# Altium PCB PCB1.PcbDoc (part 1 of 2)
Units mil, origin at the board's own origin, x right, y up, seen from the top; angles counter-clockwise.
Board outline 7474.71 x 6958.47 mil, 4 copper layers (PowerLayer1, PowerLayer2, GndLayer, SignalLayer), stack 30.635 mil thick; 145 components, 77 nets, 394 pads, 59 vias.
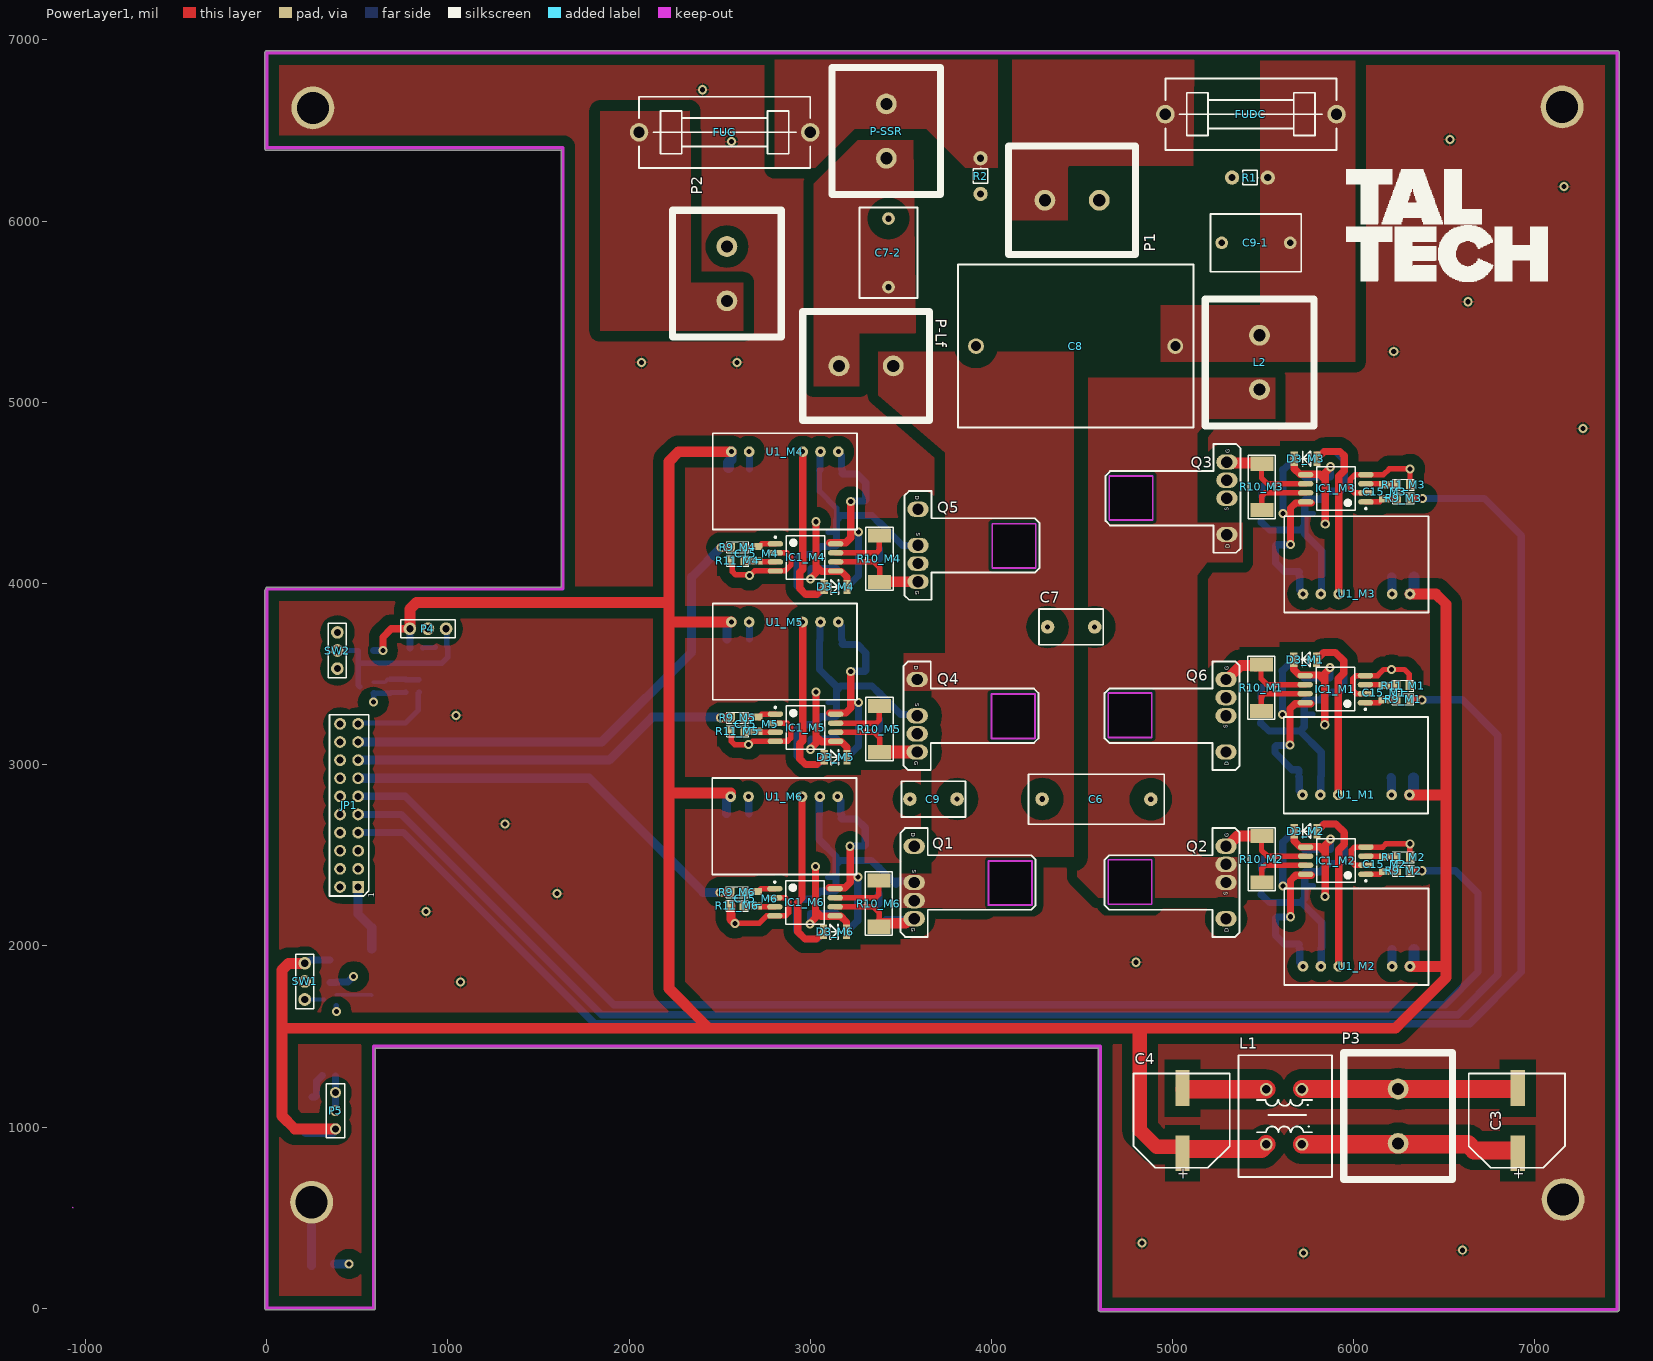
[diagram p0: PowerLayer1 view]
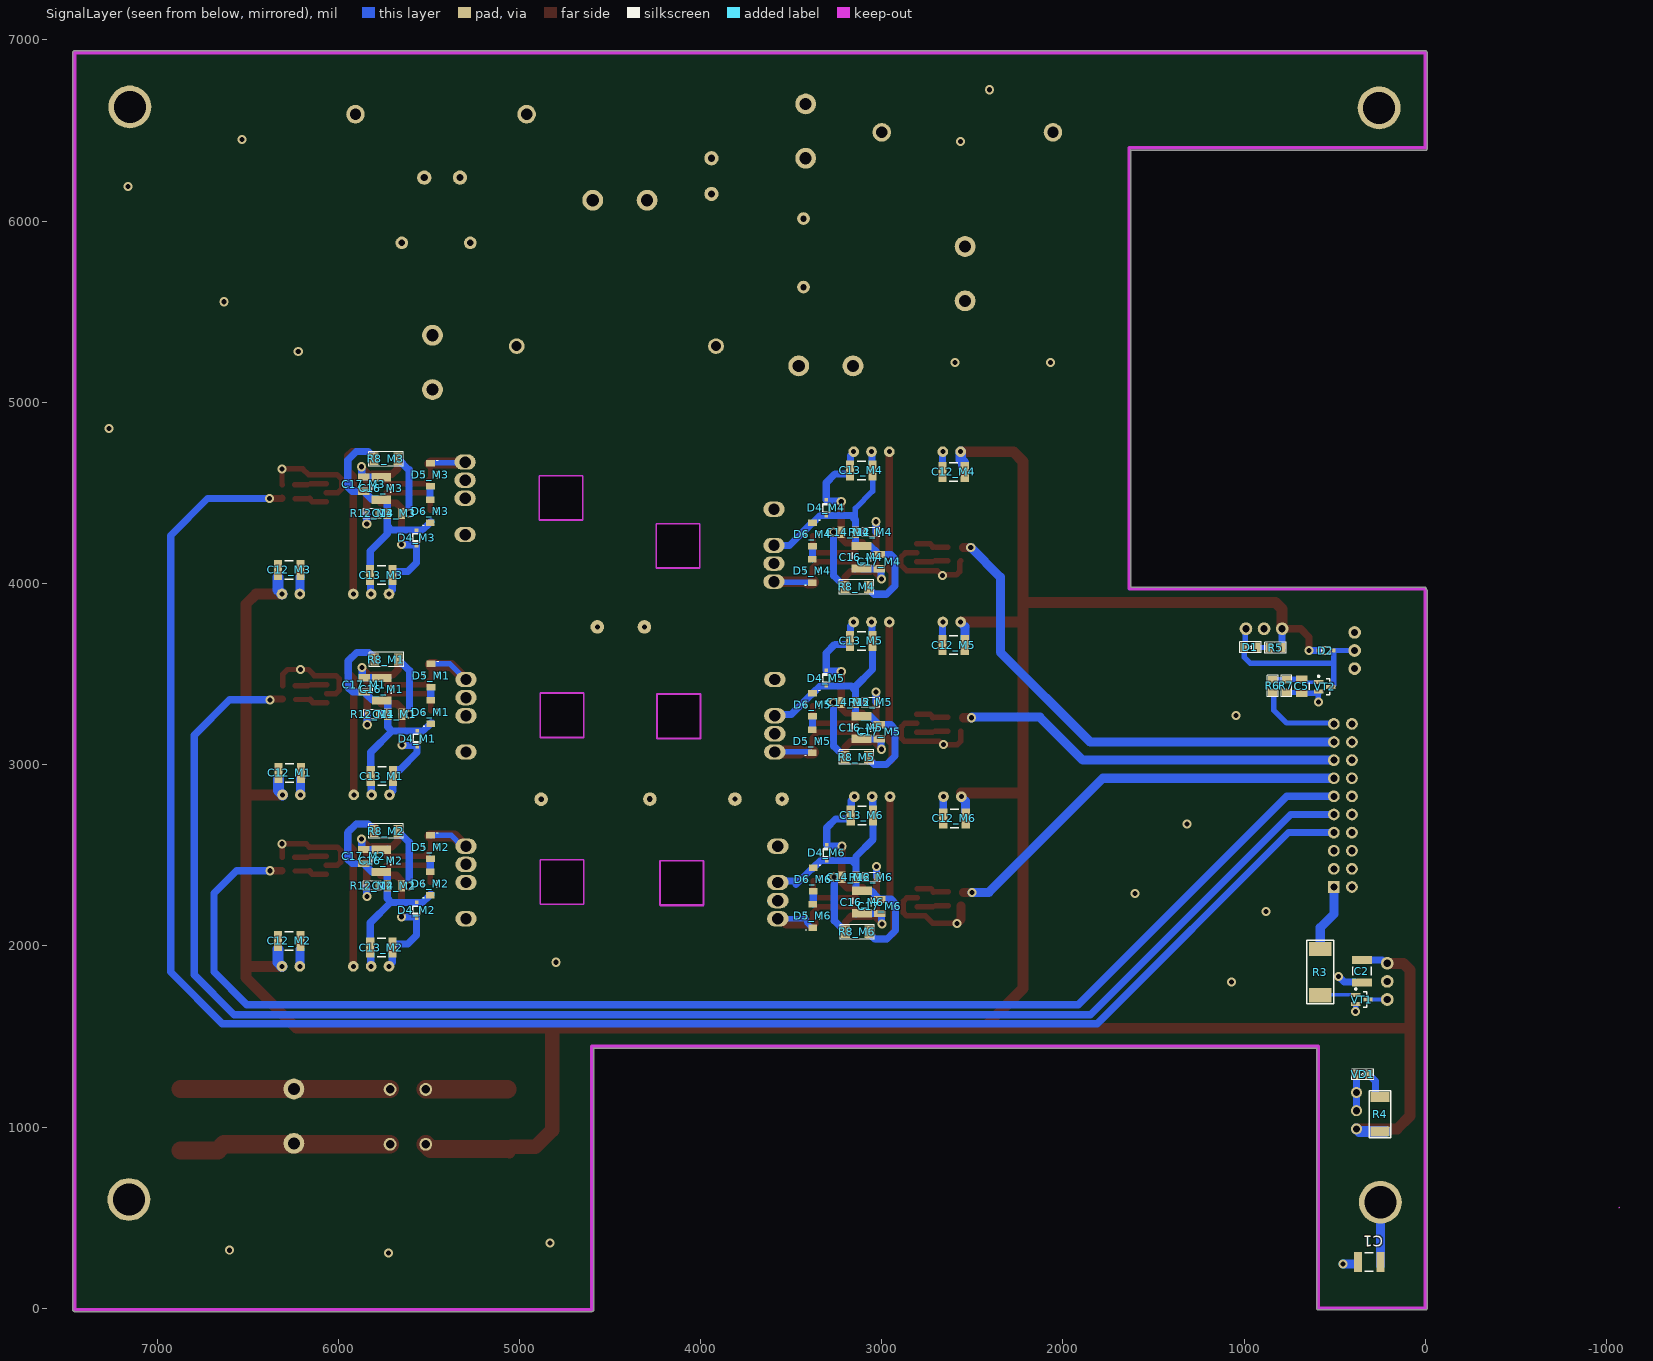
[diagram p1: SignalLayer view, seen from below]
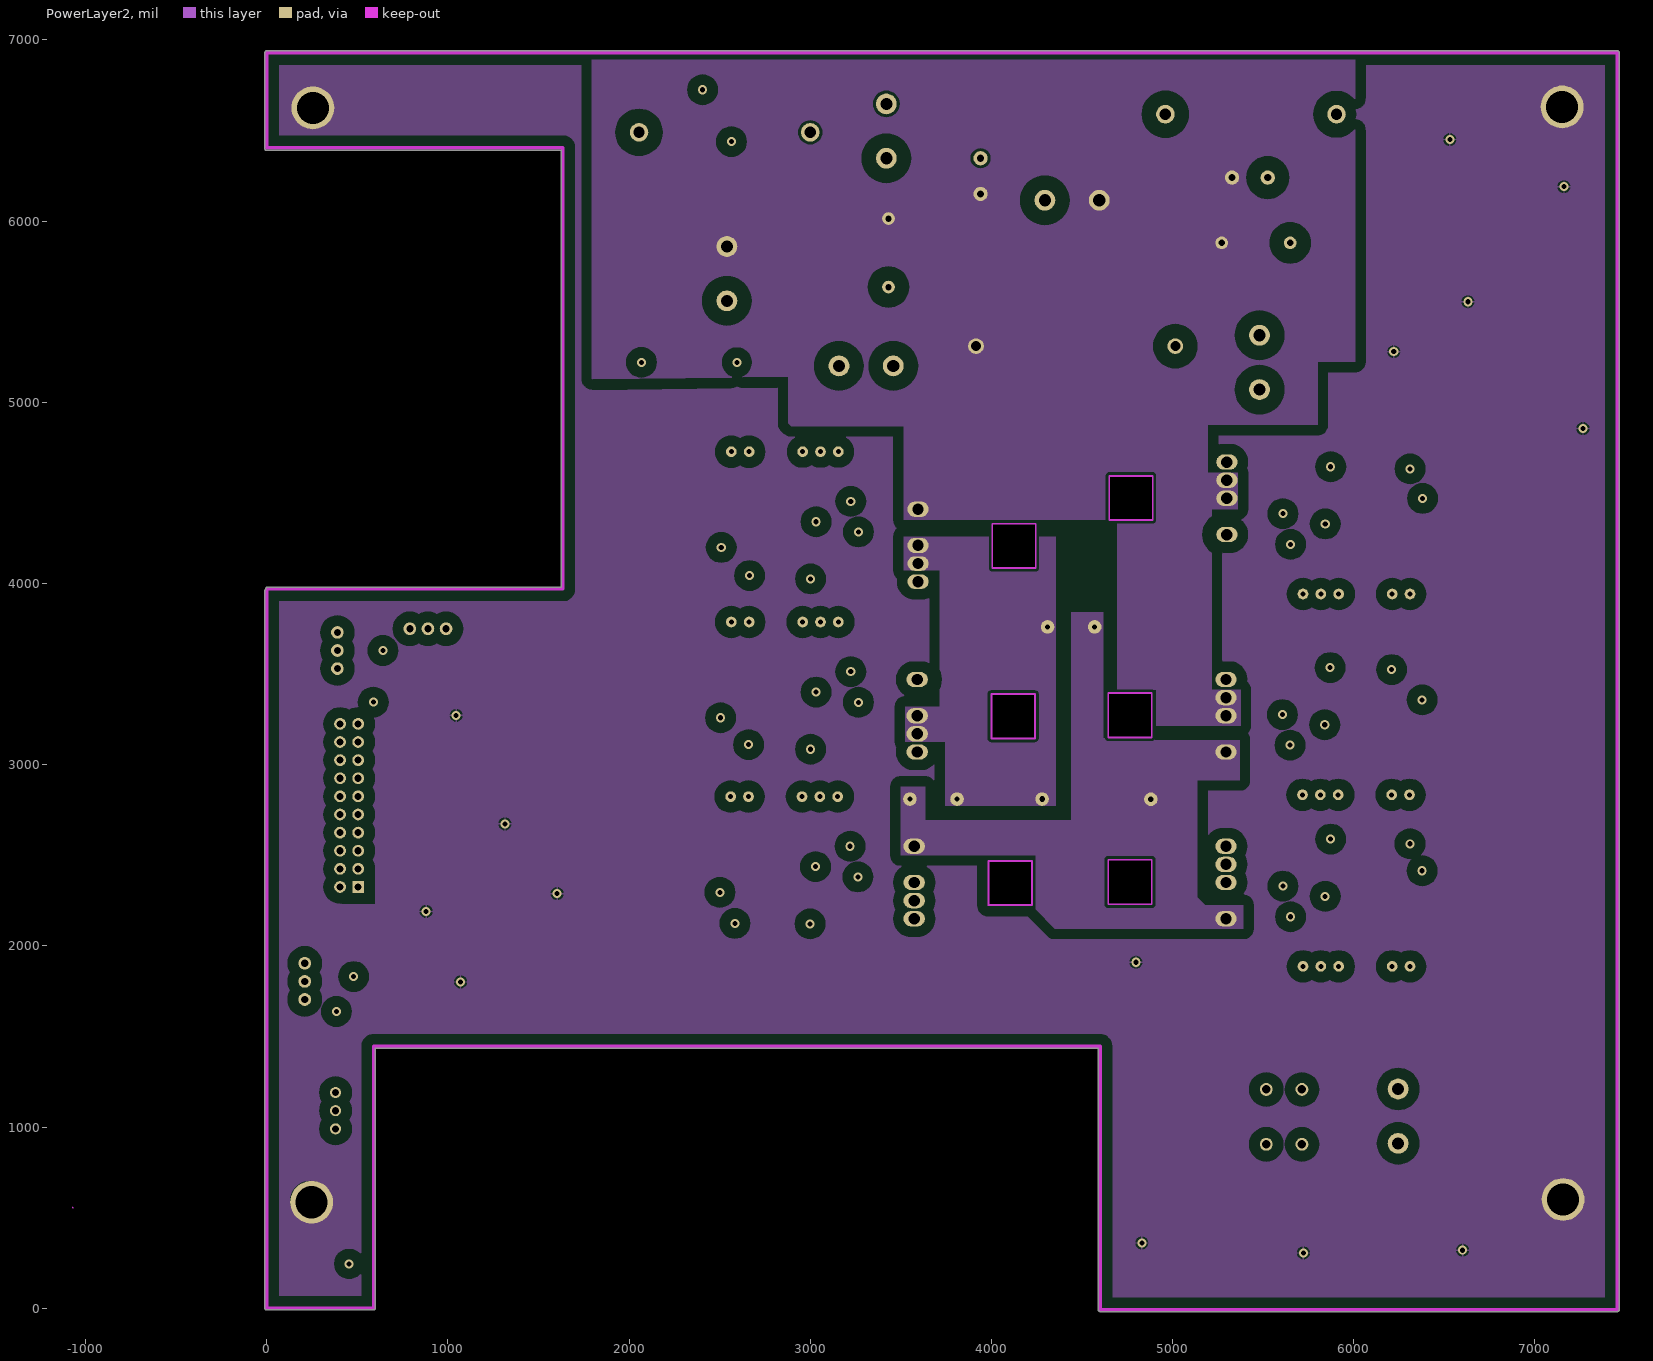
[diagram p2: PowerLayer2]
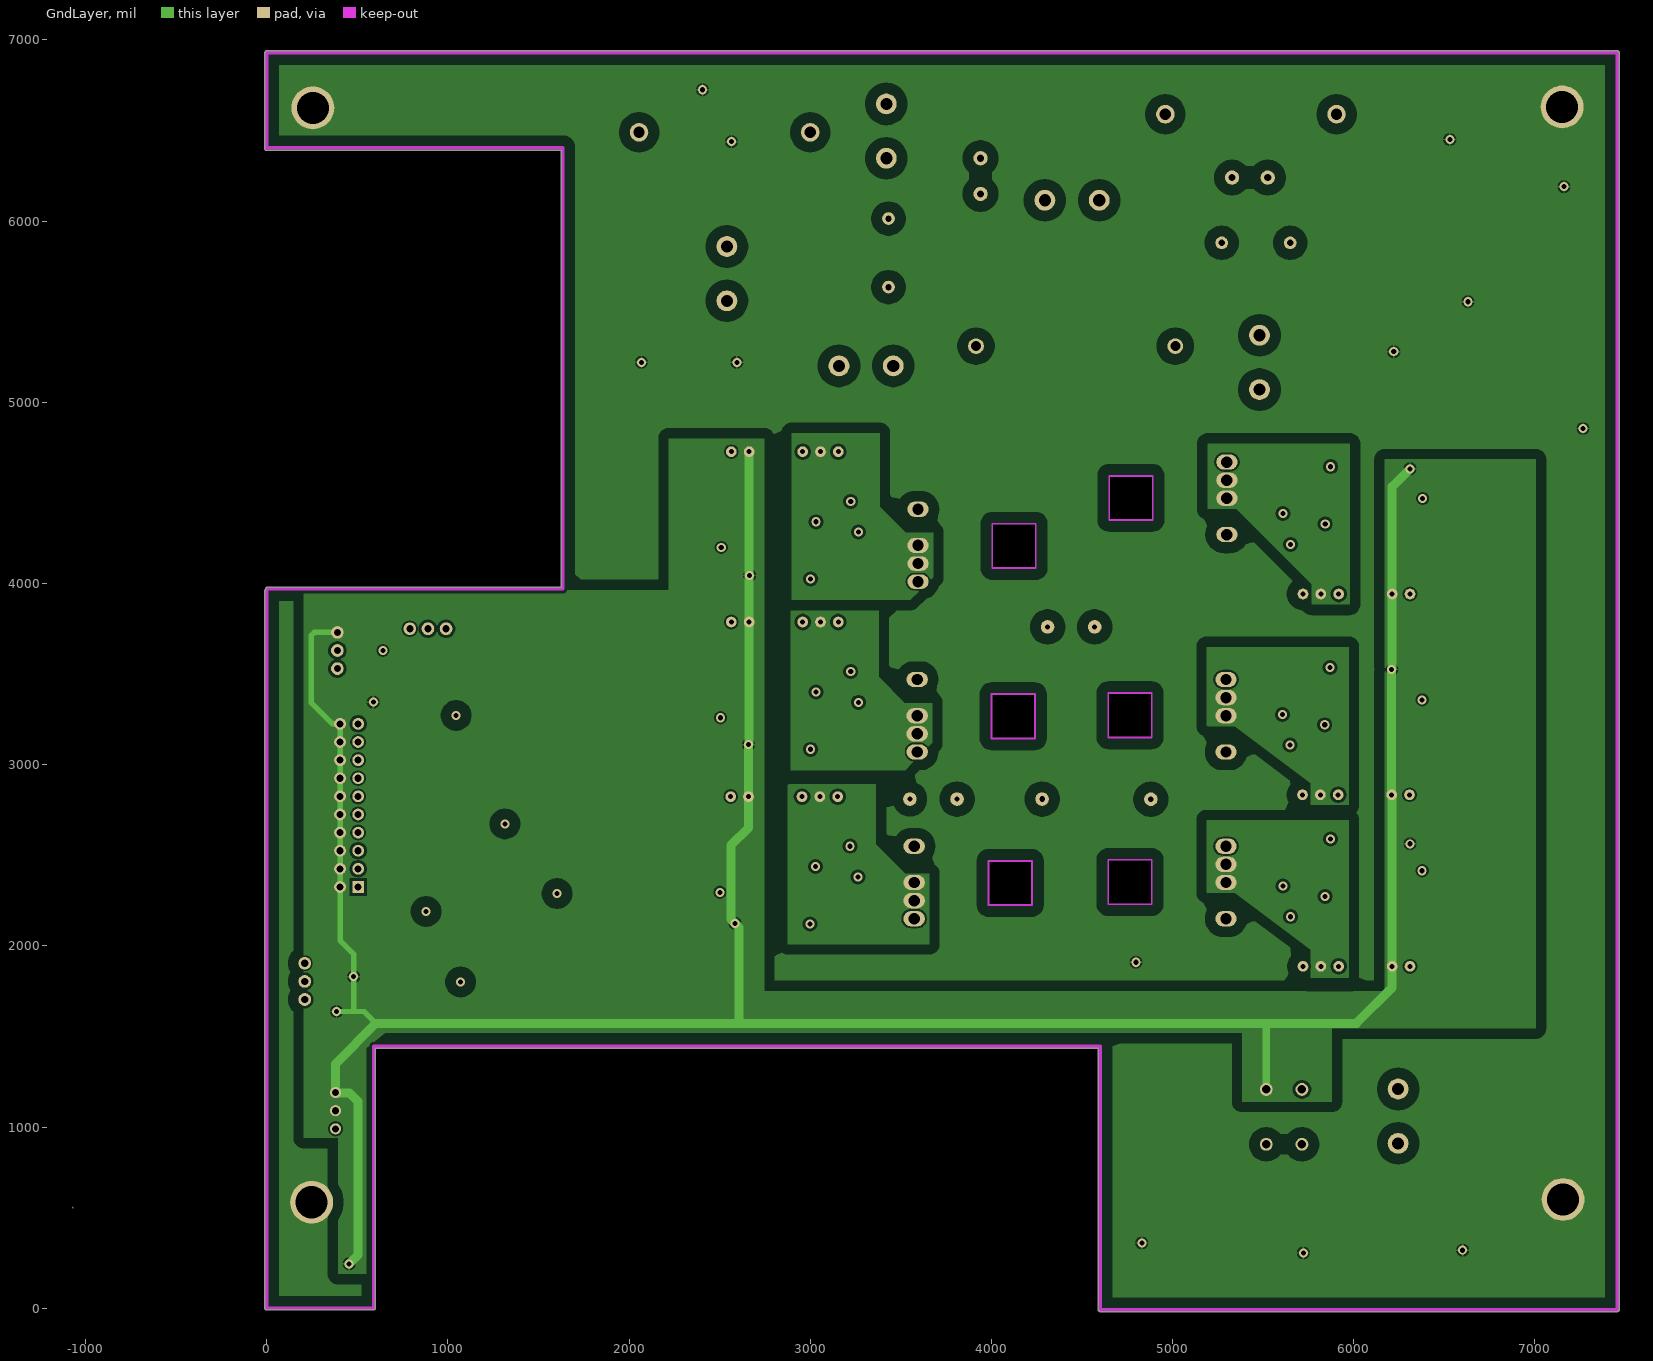
[diagram p3: GndLayer]

## Layer stack, top to bottom
Top Solder: solder mask 0.4, Solder Resist, Dk 3.5
PowerLayer1: signal copper 1.4
Dielectric 1: core 10, FR-4, Dk 4.2
PowerLayer2: signal copper 1.4173
Dielectric 5: prepreg 5, Dk 4.2
GndLayer: signal copper 1.4173
Dielectric 3: core 10, Dk 4.2
SignalLayer: signal copper 1.4
Bottom Solder: solder mask 0.4, Solder Resist, Dk 3.5

## Board outline
-9.86,0.63 -9.86,3960 cw(c0,3960) -4.78,3968.62 cw(c5,3969.86) 5,3979.72 1625.14,3979.72 1625.14,6390.14 0,6390.14 cw(c0,6400) -9.86,6400 -9.86,6930 cw(c0,6930) 0,6939.86 7455,6939.86 cw(c7455,6930) 7464.86,6930 7464.86,-8.75 cw(c7455,-8.75) 7455,-18.61 4600,-18.61 cw(c4600,-8.75) 4590.14,-8.75 4590.14,1435.14 599.86,1435.14 599.86,0.63 cw(c590,0.63) 590,-9.23 0,-9.23 cw(c0,0.63)
cut-out: 4240,3390 4240,3145 4000,3145 4000,3390
cut-out: 4645,3395 4885,3395 4885,3150 4645,3150
cut-out: 4650,4593.13 4890,4593.13 4890,4348.13 4650,4348.13
cut-out: 3983.78,2465.63 4223.78,2465.63 4223.78,2220.63 3983.78,2220.63
cut-out: 4645,2474.6 4885,2474.6 4885,2229.6 4645,2229.6
cut-out: 4005,4330 4245,4330 4245,4085 4005,4085

## Design rules (kind name [scope] priority, off if disabled: settings)
Clearance Clearance_Gate_Source2 [InNet('G2') vs InNet('MS2')] p1: gap=10 ignorepadtopadclearanceinfootprint=FALSE except(0: Arc-Hole Track-Hole SMDPad-Hole THPad-Hole Via-Hole Fill-Hole Poly-Hole Region-Hole Text-Hole)
Clearance Clearance_Gate_source3 [InNet('G3') vs InNet('MS3')] p2: gap=10 ignorepadtopadclearanceinfootprint=FALSE except(0: Arc-Hole Track-Hole SMDPad-Hole THPad-Hole Via-Hole Fill-Hole Poly-Hole Region-Hole Text-Hole)
Clearance Clearance_Gate_Source4 [InNet('G4') vs InNet('MS5')] p3: gap=10 ignorepadtopadclearanceinfootprint=FALSE except(0: Arc-Hole Track-Hole SMDPad-Hole THPad-Hole Via-Hole Fill-Hole Poly-Hole Region-Hole Text-Hole)
Clearance Clearance_Gate_Source5 [InNet('G5') vs InNet('MS5')] p4: gap=10 ignorepadtopadclearanceinfootprint=FALSE except(0: Arc-Hole Track-Hole SMDPad-Hole THPad-Hole Via-Hole Fill-Hole Poly-Hole Region-Hole Text-Hole)
Clearance Clearance_Gate_Source6 [InNet('G6') vs InNet('MS6')] p5: gap=10 ignorepadtopadclearanceinfootprint=FALSE except(0: Arc-Hole Track-Hole SMDPad-Hole THPad-Hole Via-Hole Fill-Hole Poly-Hole Region-Hole Text-Hole)
Clearance Clearance_Gate_Source1 [InNet('G1') vs InNet('MS3')] p6: gap=10 ignorepadtopadclearanceinfootprint=FALSE except(0: Arc-Hole Track-Hole SMDPad-Hole THPad-Hole Via-Hole Fill-Hole Poly-Hole Region-Hole Text-Hole)
Clearance Clearance_Power [InNetClass('Power') vs InNetClass('Power')] p7: gap=78.74 ignorepadtopadclearanceinfootprint=FALSE except(0: Arc-Hole Track-Hole SMDPad-Hole THPad-Hole Via-Hole Fill-Hole Poly-Hole Region-Hole Text-Hole)
Clearance Clearance_all_Gates [InNetClass('G[6..1]') vs InNetClass('Power')] p8: gap=78.74 ignorepadtopadclearanceinfootprint=FALSE except(0: Arc-Hole Track-Hole SMDPad-Hole THPad-Hole Via-Hole Fill-Hole Poly-Hole Region-Hole Text-Hole)
Clearance Clearance_Signals [InNetClass('Signal') vs InNetClass('Signal')] p9: gap=10 ignorepadtopadclearanceinfootprint=FALSE except(0: Arc-Hole Track-Hole SMDPad-Hole THPad-Hole Via-Hole Fill-Hole Poly-Hole Region-Hole Text-Hole)
Clearance Clearance_PE [InNet('PE')] p10: gap=59.06 ignorepadtopadclearanceinfootprint=FALSE except(0: Arc-Hole Track-Hole SMDPad-Hole THPad-Hole Via-Hole Fill-Hole Poly-Hole Region-Hole Text-Hole)
Clearance Clearance_Power_12 [InNetClass('Power') vs InNetClass('+12')] p11: gap=78.74 ignorepadtopadclearanceinfootprint=FALSE except(0: Arc-Hole Track-Hole SMDPad-Hole THPad-Hole Via-Hole Fill-Hole Poly-Hole Region-Hole Text-Hole)
Clearance Clearence_Power_Signal [InNetClass('Power') vs InNetClass('Signal')] p12: gap=78.74 ignorepadtopadclearanceinfootprint=FALSE except(0: Arc-Hole Track-Hole SMDPad-Hole THPad-Hole Via-Hole Fill-Hole Poly-Hole Region-Hole Text-Hole)
Clearance Clearance_Control_signals [All] p13: gap=15 ignorepadtopadclearanceinfootprint=FALSE except(0: Arc-Hole Track-Hole SMDPad-Hole THPad-Hole Via-Hole Fill-Hole Poly-Hole Region-Hole Text-Hole)
Clearance Clearance_basic [All] p14: gap=10 ignorepadtopadclearanceinfootprint=FALSE except(0: Arc-Hole Track-Hole SMDPad-Hole THPad-Hole Via-Hole Fill-Hole Poly-Hole Region-Hole Text-Hole)
DiffPairsRouting [All] p1: maxlimit=10 minlimit=10 mostfreqgap=10 toplayer_minwidth=15 toplayer_maxwidth=15 toplayer_prefwidth=15 midlayer1_minwidth=15 midlayer1_maxwidth=15 midlayer1_prefwidth=15 midlayer2_minwidth=15 midlayer2_maxwidth=15 midlayer2_prefwidth=15 bottomlayer_minwidth=15 bottomlayer_maxwidth=15 bottomlayer_prefwidth=15 substack1={8FED7303-0B10-419C-B2EB-FF9315F84D3A} toplayer_{8fed7303-0b10-419c-b2eb-ff9315f84d3a}_minwidth=15 toplayer_{8fed7303-0b10-419c-b2eb-ff9315f84d3a}_maxwidth=15 toplayer_{8fed7303-0b10-419c-b2eb-ff9315f84d3a}_prefwidth=15 midlayer1_{8fed7303-0b10-419c-b2eb-ff9315f84d3a}_minwidth=15 midlayer1_{8fed7303-0b10-419c-b2eb-ff9315f84d3a}_maxwidth=15 midlayer1_{8fed7303-0b10-419c-b2eb-ff9315f84d3a}_prefwidth=15 midlayer2_{8fed7303-0b10-419c-b2eb-ff9315f84d3a}_minwidth=15 midlayer2_{8fed7303-0b10-419c-b2eb-ff9315f84d3a}_maxwidth=15 midlayer2_{8fed7303-0b10-419c-b2eb-ff9315f84d3a}_prefwidth=15 bottomlayer_{8fed7303-0b10-419c-b2eb-ff9315f84d3a}_minwidth=15 bottomlayer_{8fed7303-0b10-419c-b2eb-ff9315f84d3a}_maxwidth=15 bottomlayer_{8fed7303-0b10-419c-b2eb-ff9315f84d3a}_prefwidth=15 substack2={A008AFF5-A1D4-49A2-BC8A-6C952DE4DF2B} toplayer_{a008aff5-a1d4-49a2-bc8a-6c952de4df2b}_minwidth=15 toplayer_{a008aff5-a1d4-49a2-bc8a-6c952de4df2b}_maxwidth=15 toplayer_{a008aff5-a1d4-49a2-bc8a-6c952de4df2b}_prefwidth=15 midlayer1_{a008aff5-a1d4-49a2-bc8a-6c952de4df2b}_minwidth=15 midlayer1_{a008aff5-a1d4-49a2-bc8a-6c952de4df2b}_maxwidth=15 midlayer1_{a008aff5-a1d4-49a2-bc8a-6c952de4df2b}_prefwidth=15 midlayer2_{a008aff5-a1d4-49a2-bc8a-6c952de4df2b}_minwidth=15 midlayer2_{a008aff5-a1d4-49a2-bc8a-6c952de4df2b}_maxwidth=15 midlayer2_{a008aff5-a1d4-49a2-bc8a-6c952de4df2b}_prefwidth=15 bottomlayer_{a008aff5-a1d4-49a2-bc8a-6c952de4df2b}_minwidth=15 bottomlayer_{a008aff5-a1d4-49a2-bc8a-6c952de4df2b}_maxwidth=15 bottomlayer_{a008aff5-a1d4-49a2-bc8a-6c952de4df2b}_prefwidth=15 substack3={C9C69313-BBEA-4D69-AB59-3BB3101C2E93} toplayer_{c9c69313-bbea-4d69-ab59-3bb3101c2e93}_minwidth=15 toplayer_{c9c69313-bbea-4d69-ab59-3bb3101c2e93}_maxwidth=15 toplayer_{c9c69313-bbea-4d69-ab59-3bb3101c2e93}_prefwidth=15 midlayer1_{c9c69313-bbea-4d69-ab59-3bb3101c2e93}_minwidth=15 midlayer1_{c9c69313-bbea-4d69-ab59-3bb3101c2e93}_maxwidth=15 midlayer1_{c9c69313-bbea-4d69-ab59-3bb3101c2e93}_prefwidth=15 midlayer2_{c9c69313-bbea-4d69-ab59-3bb3101c2e93}_minwidth=15 midlayer2_{c9c69313-bbea-4d69-ab59-3bb3101c2e93}_maxwidth=15 midlayer2_{c9c69313-bbea-4d69-ab59-3bb3101c2e93}_prefwidth=15 bottomlayer_{c9c69313-bbea-4d69-ab59-3bb3101c2e93}_minwidth=15 bottomlayer_{c9c69313-bbea-4d69-ab59-3bb3101c2e93}_maxwidth=15 bottomlayer_{c9c69313-bbea-4d69-ab59-3bb3101c2e93}_prefwidth=15 maxuncoupledlength=500
PolygonConnect PolygonConnect_4 [All] p1: connectstyle=Relief reliefconductorwidth=10 reliefentries=4 polygonreliefangle="45 Angle" airgapwidth=10
PolygonConnect PolygonConnect_3 [All vs IsNamedPolygon('MS3_L03_P048')] p2: connectstyle=Relief reliefconductorwidth=10 reliefentries=4 polygonreliefangle="90 Angle" airgapwidth=15.75
PolygonConnect PolygonConnect_2 [All vs IsNamedPolygon('GND_L03_P040')] p3: connectstyle=Relief reliefconductorwidth=10 reliefentries=4 polygonreliefangle="90 Angle" airgapwidth=11.81
PolygonConnect PolygonConnect_1 [All vs IsNamedPolygon('MS1_L03_P047') Or  IsNamedPolygon('GND_L03_P025')] p4: connectstyle=Relief reliefconductorwidth=10 reliefentries=4 polygonreliefangle="90 Angle" airgapwidth=15.75
PolygonConnect [All] p5: connectstyle=Relief reliefconductorwidth=10 reliefentries=4 polygonreliefangle="90 Angle" airgapwidth=10
RoomDefinition M5 [InComponentClass('M5')] p1: confinementstyle=ConfineIn formatcopy=TRUE lockcomponents=FALSE outline 2434.6,2979.95 3485,2979.95 3485,3896.1 2434.6,3896.1
RoomDefinition M4 [InComponentClass('M4')] p2: confinementstyle=ConfineIn formatcopy=TRUE lockcomponents=FALSE outline 2434.6,3920 3485,3920 3485,4836.16 2434.6,4836.16
RoomDefinition M3 [InComponentClass('M3')] p3: confinementstyle=ConfineIn formatcopy=TRUE lockcomponents=FALSE outline 6440.2,4749.32 5389.8,4749.32 5389.8,3833.17 6440.2,3833.17
RoomDefinition M6 [InComponentClass('M6')] p4: confinementstyle=ConfineIn formatcopy=TRUE lockcomponents=FALSE outline 2431.37,2016.43 3481.77,2016.43 3481.77,2932.59 2431.37,2932.59
RoomDefinition M2 [InComponentClass('M2')] p5: confinementstyle=ConfineIn formatcopy=TRUE lockcomponents=FALSE outline 6440.08,2693.93 5389.68,2693.93 5389.68,1777.77 6440.08,1777.77
RoomDefinition M1 [InComponentClass('M1')] p6: confinementstyle=ConfineIn formatcopy=TRUE lockcomponents=FALSE outline 6437.4,3640.69 5387,3640.69 5387,2724.53 6437.4,2724.53
RoutingVias [All] p1: holewidth=28 width=50 viastyle="Through Hole" minholewidth=28 minwidth=50 maxholewidth=28 maxwidth=50
SolderMaskExpansion [All] p1: expansion=4 istentingtop=FALSE
Width [InNetClass('All Nets')] p1 off: maxlimit=60 minlimit=10 preferedwidth=20 substack1={8FED7303-0B10-419C-B2EB-FF9315F84D3A} substack2={A008AFF5-A1D4-49A2-BC8A-6C952DE4DF2B} substack3={C9C69313-BBEA-4D69-AB59-3BB3101C2E93}
Width Width_1 [All] p2 off: maxlimit=10 minlimit=10 preferedwidth=10 substack1={8FED7303-0B10-419C-B2EB-FF9315F84D3A} substack2={A008AFF5-A1D4-49A2-BC8A-6C952DE4DF2B} substack3={C9C69313-BBEA-4D69-AB59-3BB3101C2E93}
29 further rules are at their usual default settings.

## Classes and differential pairs
channel class 04_Driver: M1 M2 M3 M4 M5 M6 M7 M8
net class Signal: +12V GND NetC15_M1_1 NetC15_M1_2 NetC15_M2_1 NetC15_M2_2 NetC15_M3_1 NetC15_M3_2 NetC15_M4_1 NetC15_M4_2 NetC15_M5_1 NetC15_M5_2 NetC15_M6_1 NetC15_M6_2 SIG+1 SIG+2 SIG+3 SIG+4 SIG+5 SIG+6
net class SIG+[10..1]: SIG+1 SIG+2 SIG+3 SIG+4 SIG+5 SIG+6 SIG+9 SIG+10
net class Power: MS2 MS3 MS5 MS6 NetC6_1 NetC7-2_1 NetFUDC_2 NetFUG_2 Vin1
net class MS[6..1]: MS2 MS3 MS5 MS6
net class G[6..1]: G1 G2 G3 G4 G5 G6
net class Driver: G1 G2 G3 G4 G5 G6 MS2 MS3 MS5 MS6 NetC13_M1_2 NetC13_M2_2 NetC13_M3_2 NetC13_M4_2 NetC13_M5_2 NetC13_M6_2 NetC16_M1_1 NetC16_M2_1 NetC16_M3_1 NetC16_M4_1 NetC16_M5_1 NetC16_M6_1 NetD3_M1_1 NetD3_M2_1 NetD3_M3_1 NetD3_M4_1 NetD3_M5_1 NetD3_M6_1 NetD5_M1_2 NetD5_M2_2 NetD5_M3_2 NetD5_M4_2 NetD5_M5_2 NetD5_M6_2 NetIC1_M1_7 NetIC1_M2_7 NetIC1_M3_7 NetIC1_M4_7 NetIC1_M5_7 NetIC1_M6_7 NetQ1_1 NetQ2_1 NetQ3_1 NetQ4_4 NetQ5-1_1 NetQ5-2_1 NetQ6-1_4 NetQ6-2_4
component class M6: C12_M6 C13_M6 C14_M6 C15_M6 C16_M6 C17_M6 D3_M6 D4_M6 D5_M6 D6_M6 IC1_M6 R8_M6 R9_M6 R10_M6 R11_M6 R12_M6 U1_M6
component class M5: C12_M5 C13_M5 C14_M5 C15_M5 C16_M5 C17_M5 D3_M5 D4_M5 D5_M5 D6_M5 IC1_M5 R8_M5 R9_M5 R10_M5 R11_M5 R12_M5 U1_M5
component class M4: C12_M4 C13_M4 C14_M4 C15_M4 C16_M4 C17_M4 D3_M4 D4_M4 D5_M4 D6_M4 IC1_M4 R8_M4 R9_M4 R10_M4 R11_M4 R12_M4 U1_M4
component class M3: C12_M3 C13_M3 C14_M3 C15_M3 C16_M3 C17_M3 D3_M3 D4_M3 D5_M3 D6_M3 IC1_M3 R8_M3 R9_M3 R10_M3 R11_M3 R12_M3 U1_M3
component class M2: C12_M2 C13_M2 C14_M2 C15_M2 C16_M2 C17_M2 D3_M2 D4_M2 D5_M2 D6_M2 IC1_M2 R8_M2 R9_M2 R10_M2 R11_M2 R12_M2 U1_M2
component class M1: C12_M1 C13_M1 C14_M1 C15_M1 C16_M1 C17_M1 D3_M1 D4_M1 D5_M1 D6_M1 IC1_M1 R8_M1 R9_M1 R10_M1 R11_M1 R12_M1 U1_M1
component class Converter: C6 C7 C8 C9 C9-1 L2 Q1 Q2 Q3 Q4 Q5 Q6
component class 01_Main: C1 C2 C3 C4 C5 C7-2 D1 D2 FUDC FUG JP1 L1 P1 P2 P3 P4 P5 P-Lf P-SSR R1 R2 R3 R4 R5 R6 R7 SW1 SW2 VD1 VT1 VT2
net class +12: +12V GND NetC3_1 NetC3_2 NetD1_2 NetR4_2

## Components (designator, comment, footprint, x,y, rotation, side; value= is the part's Value field where it differs from the comment)
C1 "Cer_large" CAPC3227X25N 310,255 r180 bottom
C2 "Cer_large" CAPC3227X25N 350,1860 r270 bottom
C3 "NACEW102M25V12.5X14" Cap_pol 5765,-355 r90 top
C4 "NACEW102M25V12.5X14" Cap_pol 3915,-355 r90 top
C5 "0.1uF, 50V" C_0805 681.54,3472.32 r270 bottom
C6 "R75PR4100AA30J" CAP_6 4880,2808.77 r90 top
C7 "C_ceram_HV" CAP_250V 4617.24,3858.43 r180 top
C7-2 "C_ceram_HV" C_ceram_HV 3431.85,5825 r90 top
C8 "R75PR4100AA30J" 32x22 4465,5310 r180 top
C9 "C_ceram_HV" CAP_250V 3503.14,2711.57 r0 top
C9-1 "C_ceram_HV" C_ceram_HV 5460,5880 r180 top
C12_M1 "Cer_large" CAPC3227X25N 6268.13,2955 r180 bottom (schematic designator C12)
C12_M2 "Cer_large" CAPC3227X25N 6270.81,2027.84 r180 bottom (schematic designator C12)
C12_M3 "Cer_large" CAPC3227X25N 6270.93,4075.3 r180 bottom (schematic designator C12)
C12_M4 "Cer_large" CAPC3227X25N 2603.49,4615.49 r0 bottom (schematic designator C12)
C12_M5 "Cer_large" CAPC3227X25N 2603.49,3659.77 r0 bottom (schematic designator C12)
C12_M6 "Cer_large" CAPC3227X25N 2598.59,2702.93 r0 bottom (schematic designator C12)
C13_M1 "Cer_large" CAPC3227X25N 5759.02,2937.14 r180 bottom (schematic designator C13)
C13_M2 "Cer_large" CAPC3227X25N 5761.7,1990.38 r180 bottom (schematic designator C13)
C13_M3 "Cer_large" CAPC3227X25N 5761.82,4045.78 r180 bottom (schematic designator C13)
C13_M4 "Cer_large" CAPC3227X25N 3112.98,4623.55 r0 bottom (schematic designator C13)
C13_M5 "Cer_large" CAPC3227X25N 3112.98,3683.49 r0 bottom (schematic designator C13)
C13_M6 "Cer_large" CAPC3227X25N 3109.75,2719.98 r0 bottom (schematic designator C13)
C14_M1 "C0805C104K5RAC" C_0805 5726.37,3277.58 r180 bottom (schematic designator C14)
C14_M2 "C0805C104K5RAC" C_0805 5729.05,2330.82 r180 bottom (schematic designator C14)
C14_M3 "C0805C104K5RAC" C_0805 5729.16,4386.21 r180 bottom (schematic designator C14)
C14_M4 "C0805C104K5RAC" C_0805 3145.63,4283.11 r0 bottom (schematic designator C14)
C14_M5 "C0805C104K5RAC" C_0805 3145.63,3343.06 r0 bottom (schematic designator C14)
C14_M6 "C0805C104K5RAC" C_0805 3142.4,2379.55 r0 bottom (schematic designator C14)
C15_M1 "C0805C100J1GAC" C_0805 6167.21,3357.63 r90 top (schematic designator C15)
C15_M2 "C0805C100J1GAC" C_0805 6169.88,2410.87 r90 top (schematic designator C15)
C15_M3 "C0805C100J1GAC" C_0805 6170,4466.26 r90 top (schematic designator C15)
C15_M4 "C0805C100J1GAC" C_0805 2704.8,4203.06 r270 top (schematic designator C15)
C15_M5 "C0805C100J1GAC" C_0805 2704.8,3263.01 r270 top (schematic designator C15)
C15_M6 "C0805C100J1GAC" C_0805 2701.57,2299.5 r270 top (schematic designator C15)
C16_M1 "Cer_large" CAPC3227X25N 5759.81,3415.61 r270 bottom (schematic designator C16)
C16_M2 "Cer_large" CAPC3227X25N 5762.49,2468.85 r270 bottom (schematic designator C16)
C16_M3 "Cer_large" CAPC3227X25N 5762.6,4524.24 r270 bottom (schematic designator C16)
C16_M4 "Cer_large" CAPC3227X25N 3112.19,4145.08 r90 bottom (schematic designator C16)
C16_M5 "Cer_large" CAPC3227X25N 3112.19,3205.03 r90 bottom (schematic designator C16)
C16_M6 "Cer_large" CAPC3227X25N 3108.96,2241.51 r90 bottom (schematic designator C16)
C17_M1 "C0805C104K5RAC" C_0805 5857.05,3479.31 r270 bottom (schematic designator C17)
C17_M2 "C0805C104K5RAC" C_0805 5859.73,2532.55 r270 bottom (schematic designator C17)
C17_M3 "C0805C104K5RAC" C_0805 5859.85,4587.94 r270 bottom (schematic designator C17)
C17_M4 "C0805C104K5RAC" C_0805 3014.95,4081.38 r90 bottom (schematic designator C17)
C17_M5 "C0805C104K5RAC" C_0805 3014.95,3141.33 r90 bottom (schematic designator C17)
C17_M6 "C0805C104K5RAC" C_0805 3011.72,2177.81 r90 bottom (schematic designator C17)
D1 "APTD2012LCGCK" LED_SMD_0805 965,3647.57 r0 bottom
D2 "MMDL914T1G" SOD323F 548.31,3630 r180 bottom
D3_M1 "Zener_1.8V" SOD123 5680.44,3461.47 r180 top (schematic designator D3)
D3_M2 "Zener_1.8V" SOD123 5683.12,2514.71 r180 top (schematic designator D3)
D3_M3 "Zener_1.8V" SOD123 5683.23,4570.11 r180 top (schematic designator D3)
D3_M4 "Zener_1.8V" SOD123 3191.56,4099.22 r0 top (schematic designator D3)
D3_M5 "Zener_1.8V" SOD123 3191.56,3159.16 r0 top (schematic designator D3)
D3_M6 "Zener_1.8V" SOD123 3188.33,2195.65 r0 top (schematic designator D3)
D4_M1 "DZ2J220M0L" SOD323F 5565,3142.84 r90 bottom (schematic designator D4)
D4_M2 "DZ2J220M0L" SOD323F 5567.68,2196.08 r90 bottom (schematic designator D4)
D4_M3 "DZ2J220M0L" SOD323F 5567.79,4251.47 r90 bottom (schematic designator D4)
D4_M4 "DZ2J220M0L" SOD323F 3307,4417.85 r270 bottom (schematic designator D4)
D4_M5 "DZ2J220M0L" SOD323F 3307,3477.79 r270 bottom (schematic designator D4)
D4_M6 "DZ2J220M0L" SOD323F 3303.77,2514.28 r270 bottom (schematic designator D4)
D5_M1 "MMSZ4678T1G" CAPM3216X18N 5487.91,3491.68 r270 bottom (schematic designator D5)
D5_M2 "MMSZ4678T1G" CAPM3216X18N 5490.59,2544.92 r270 bottom (schematic designator D5)
D5_M3 "MMSZ4678T1G" CAPM3216X18N 5490.71,4600.32 r270 bottom (schematic designator D5)
D5_M4 "MMSZ4678T1G" CAPM3216X18N 3384.09,4069.01 r90 bottom (schematic designator D5)
D5_M5 "MMSZ4678T1G" CAPM3216X18N 3384.09,3128.95 r90 bottom (schematic designator D5)
D5_M6 "MMSZ4678T1G" CAPM3216X18N 3380.86,2165.44 r90 bottom (schematic designator D5)
D6_M1 "MMSZ4678T1G" CAPM3216X18N 5490,3290.16 r90 bottom (schematic designator D6)
D6_M2 "MMSZ4678T1G" CAPM3216X18N 5492.68,2343.4 r90 bottom (schematic designator D6)
D6_M3 "MMSZ4678T1G" CAPM3216X18N 5492.79,4398.8 r90 bottom (schematic designator D6)
D6_M4 "MMSZ4678T1G" CAPM3216X18N 3382,4270.53 r270 bottom (schematic designator D6)
D6_M5 "MMSZ4678T1G" CAPM3216X18N 3382,3330.47 r270 bottom (schematic designator D6)
D6_M6 "MMSZ4678T1G" CAPM3216X18N 3378.77,2366.96 r270 bottom (schematic designator D6)
FUDC "Fuse 1" Fuse5x20mm 5904.88,6590 r180 top
FUG "Fuse 1" Fuse5x20mm 3000,6490 r180 top
IC1_M1 "ACPL-H342" SOIC127P970X330-8N 5897.93,3416.68 r180 top (schematic designator IC1)
IC1_M2 "ACPL-H342" SOIC127P970X330-8N 5900.6,2469.92 r180 top (schematic designator IC1)
IC1_M3 "ACPL-H342" SOIC127P970X330-8N 5900.72,4525.32 r180 top (schematic designator IC1)
IC1_M4 "ACPL-H342" SOIC127P970X330-8N 2974.08,4144.01 r0 top (schematic designator IC1)
IC1_M5 "ACPL-H342" SOIC127P970X330-8N 2974.08,3203.95 r0 top (schematic designator IC1)
IC1_M6 "ACPL-H342" SOIC127P970X330-8N 2970.85,2240.44 r0 top (schematic designator IC1)
JP1 "Header 2X10PX2.54mm" "Header 2X10PX2.54mm" 505,2325 r90 top
L1 "Commom_mode_choke" Common_mode 5638.94,1101.3 r180 top
L2 "MB322-750M02" 2_HOLES_7.5 5480,5370 r90 top
P1 "MB322-750M02" 2_HOLES_7.5 4295,6115 r180 top
P2 "MB322-750M02" 2_HOLES_7.5 2540,5560 r270 top
P3 "MB322-750M02" 2_HOLES_7.5 6245,1209.96 r90 top
P4 "Header 3x2.54mm" 3_HOLES#1 890,3750 r0 top
P5 "Header 3x2.54mm" 3_HOLES#2 380,1090 r90 top
P-Lf "MB322-750M02" 2_HOLES_7.5 3458.48,5200.92 r0 top
P-SSR "MB322-750M02" 2_HOLES_7.5 3420,6346.85 r270 top
Q1 "Cree_4wires" VT4_SicMosfet#1 3573.78,2349.6 r0 top
Q2 "Cree_4wires" VT4_SicMosfet#1 5295,2349.6 r180 top
Q3 "Cree_4wires" VT4_SicMosfet#1 5300,4470 r180 top
Q4 "Cree_4wires" VT4_SicMosfet#1 3590,3270 r0 top
Q5 "Cree_4wires" VT4_SicMosfet#2 3595,4210 r0 top
Q6 "Cree_4wires" VT4_SicMosfet#1 5295,3270 r180 top
R1 "Varistor" "Axial 0.2" 5328.15,6240 r0 top
R2 "Varistor" "Axial 0.2" 3940,6150 r90 top
R3 "RK73B3ATTE120J" SMD_2512 580,1855 r270 bottom
R4 "R300" SMD_2010 250,1065 r90 bottom
R5 "2k, 0.125W, 1%" SMD_0805 826.18,3645.75 r0 bottom
R6 "47, 0.330 W" SMD_0805 841.54,3434.68 r90 bottom
R7 "2k, 0.125W, 1%" SMD_0805 766.54,3434.68 r90 bottom
R8_M1 "RK73H2BTTD1002F" SMD_1206 5708.63,3579.58 r0 bottom (schematic designator R8)
R8_M2 "RK73H2BTTD1002F" SMD_1206 5711.31,2632.82 r0 bottom (schematic designator R8)
R8_M3 "RK73H2BTTD1002F" SMD_1206 5711.42,4688.22 r0 bottom (schematic designator R8)
R8_M4 "RK73H2BTTD1002F" SMD_1206 3163.37,3981.11 r180 bottom (schematic designator R8)
R8_M5 "RK73H2BTTD1002F" SMD_1206 3163.37,3041.05 r180 bottom (schematic designator R8)
R8_M6 "RK73H2BTTD1002F" SMD_1206 3160.15,2077.54 r180 bottom (schematic designator R8)
R9_M1 "RK73H2ATTD1600F" SMD_0805 6272.21,3361.68 r180 top (schematic designator R9)
R9_M2 "RK73H2ATTD1600F" SMD_0805 6274.88,2414.92 r180 top (schematic designator R9)
R9_M3 "RK73H2ATTD1600F" SMD_0805 6275,4470.32 r180 top (schematic designator R9)
R9_M4 "RK73H2ATTD1600F" SMD_0805 2599.8,4199.01 r0 top (schematic designator R9)
R9_M5 "RK73H2ATTD1600F" SMD_0805 2599.8,3258.95 r0 top (schematic designator R9)
R9_M6 "RK73H2ATTD1600F" SMD_0805 2596.57,2295.44 r0 top (schematic designator R9)
R10_M1 "RK73B3ATTE120J" SMD_2512 5490,3424.47 r90 top (schematic designator R10)
R10_M2 "RK73B3ATTE120J" SMD_2512 5492.68,2477.7 r90 top (schematic designator R10)
R10_M3 "RK73B3ATTE120J" SMD_2512 5492.79,4533.1 r90 top (schematic designator R10)
R10_M4 "RK73B3ATTE120J" SMD_2512 3382,4136.22 r270 top (schematic designator R10)
R10_M5 "RK73B3ATTE120J" SMD_2512 3382,3196.17 r270 top (schematic designator R10)
R10_M6 "RK73B3ATTE120J" SMD_2512 3378.77,2232.66 r270 top (schematic designator R10)
R11_M1 "RK73H2ATTD1600F" SMD_0805 6272.21,3436.37 r180 top (schematic designator R11)
R11_M2 "RK73H2ATTD1600F" SMD_0805 6274.88,2489.61 r180 top (schematic designator R11)
R11_M3 "RK73H2ATTD1600F" SMD_0805 6275,4545 r180 top (schematic designator R11)
R11_M4 "RK73H2ATTD1600F" SMD_0805 2599.8,4124.32 r0 top (schematic designator R11)
R11_M5 "RK73H2ATTD1600F" SMD_0805 2599.8,3184.27 r0 top (schematic designator R11)
R11_M6 "RK73H2ATTD1600F" SMD_0805 2596.57,2220.76 r0 top (schematic designator R11)
R12_M1 "R4K7" smd_0603 5810.13,3277.58 r0 bottom (schematic designator R12)
R12_M2 "R4K7" smd_0603 5812.8,2330.82 r0 bottom (schematic designator R12)
R12_M3 "R4K7" smd_0603 5812.92,4386.21 r0 bottom (schematic designator R12)
R12_M4 "R4K7" smd_0603 3061.88,4283.11 r180 bottom (schematic designator R12)
R12_M5 "R4K7" smd_0603 3061.88,3343.06 r180 bottom (schematic designator R12)
R12_M6 "R4K7" smd_0603 3058.65,2379.55 r180 bottom (schematic designator R12)
SW1 "09.03290.01" 3_HOLES#1 210,1803.7 r90 top
SW2 "SWITCH3" 3_HOLES#1 390,3630 r90 top
U1_M1 "MGJ2D242005SC" MGJ2 6032.07,2656.3 r270 top (schematic designator U1)
U1_M2 "MGJ2D242005SC" MGJ2 6034.75,1709.54 r270 top (schematic designator U1)
U1_M3 "MGJ2D242005SC" MGJ2 6034.86,3764.93 r270 top (schematic designator U1)
U1_M4 "MGJ2D242005SC" MGJ2 2839.93,4904.39 r90 top (schematic designator U1)
U1_M5 "MGJ2D242005SC" MGJ2 2839.93,3964.34 r90 top (schematic designator U1)
U1_M6 "MGJ2D242005SC" MGJ2 2836.7,3000.82 r90 top (schematic designator U1)
VD1 "APTD2012LCGCK" LED_SMD_0805 345.92,1290.05 r0 bottom
VT1 "BSS138P" SOT65P210X110-3N 350,1703.7 r180 bottom
VT2 "BSS138P" SOT65P210X110-3N 555,3429.68 r180 bottom

## Footprints (in the part's own frame and the unit in brackets; to place one, negate y for a bottom-side part, rotate by r counter-clockwise, add the part's x,y. Pads: shape width x height; smd on the part's side, far side on the other; paste and mask are expansions set on the pad)
2_HOLES_7.5 [mil]
  round 115 hole 66.93: 1(-300,0) 2(0,0)
  silkscreen extent -500,-300 200,300
3_HOLES#1 [mil]
  round 70 hole 39.37: 1(-100,0) 2(0,0) 3(100,0)
  silkscreen extent -150,-50 150,50
3_HOLES#2 [mil]
  round 61 hole 39.37: 1(-100,0) 2(0,0) 3(100,0)
  silkscreen extent -150,-50 150,50
32x22 [mm]
  round 2.2 hole 1.4: 1(-13.97,0) 2(13.97,0)
  silkscreen extent -16.51,-11.43 16.51,11.43
"Axial 0.2" [mm]
  round 2 hole 1: 1(0,0) 2(5,0)
  silkscreen extent 1.4,-1 3.68,1
C_0805 [mm]
  rect 1x1.6 smd: 1(0,0) 2(2,0)
  silkscreen extent 0.51,-1.02 1.52,1.02, body extent 0.02,-0.62 2.02,0.63, height 0.78
C_ceram_HV [mil]
  round 70 hole 35.43: 1(-188.98,0) 2(188.98,0)
  silkscreen extent -250,-160 250,160
CAP_6 [mm]
  round 1.905 hole 0.8: 1(0,0) 2(0.031,15.24)
  silkscreen extent -3.5,-1.88 3.51,17.14
CAP_250V [mm]
  round 1.905 hole 0.7: 1(1.2,2.5) 2(7.8,2.5)
  silkscreen extent 0,0 9,5
Cap_pol [mil]
  rect 196.85x78.74 smd mask+4: 1(1210,-1140)
  rect 196.85x78.74 smd: 2(1570,-1140)
  silkscreen extent 1130,-1400 1650,-870
CAPC3227X25N [mm]
  rect 1.15x2.8 smd: 1(-1.575,0) 2(1.575,0)
  silkscreen extent -0.6,-1.3 0.6,1.3, body extent -1.75,-1.35 1.75,1.35, height 2.5
CAPM3216X18N [mm]
  rect 0.91x1.22 smd: 1(-1.635,0) 2(1.635,0)
  silkscreen extent -2.04,-0.95 0.48,1, body extent -1.42,-0.9 1.42,0.9, height 1.35
Common_mode [mm]
  round 1.8 hole 1.2: 1(-1.9,5) 2(-1.9,-2.7) 3(3.1,-2.7) 4(3.1,5)
  silkscreen extent -6.1,-7.5 7,9.6
Fuse5x20mm [mm]
  round 2.6 hole 1.6: 1(0,0) 2(24,0)
  silkscreen extent 0,-5 24,5
"Header 2X10PX2.54mm" [mil]
  rect 65x65 hole 39.37: 1(0,0)
  round 65 hole 39.37: 2(0,100) 3(100,0) 4(100,100) 5(200,0) 6(200,100) 7(300,0) 8(300,100) 9(400,0) 10(400,100) 11(500,0) 12(500,100) 13(600,0) 14(600,100) 15(700,0) 16(700,100) 17(800,0) 18(800,100) 19(900,0) 20(900,100)
  silkscreen extent -50,-58 950,158
LED_SMD_0805 [mm]
  rect 1.05x1.3 smd: 1(-0.889,0) 2(0.889,0)
  silkscreen extent -1.52,-0.76 1.52,0.76
MGJ2 [mm]
  round 1.5 hole 0.7: 1(-4.5,7) 1(-4.5,7) 2(-4.5,4.5) 5(-4.5,-3) 6(-4.5,-5.5) 7(-4.5,-8)
  silkscreen extent -15.4,-10.64 -1.9,9.6
smd_0603 [mm]
  rect 0.6x0.9 smd: 1(-0.75,0) 2(0.75,0)
  silkscreen extent -1.27,-0.64 1.27,0.64
SMD_0805 [mm]
  rect 1.05x1.3 smd: 1(-0.889,0) 2(0.889,0)
  silkscreen extent -1.52,-0.76 1.52,0.76
SMD_1206 [mm]
  rect 1.25x1.7 smd: 1(-1.016,0) 2(2.286,0)
  silkscreen extent -1.78,-1.02 3.05,1.02
SMD_2010 [mm]
  rect 1.4x2.6 smd: 1(-2.286,0) 2(2.54,0)
  silkscreen extent -3.17,-1.52 3.43,1.52
SMD_2512 [mm]
  rect 2x3.2 smd: 1(-3.25,0) 2(3.25,0)
  silkscreen extent -4.44,-1.91 4.44,1.91
SOD123 [mm]
  rect 1x2 smd: 1(-2.9,-3) 2(0.3,-3)
  silkscreen extent -2.3,-4 -0.3,-2
SOD323F [mm]
  rect 0.5x0.5 smd: 1(1.1,0) 2(-1.1,0)
  silkscreen extent -0.5,-0.5 0.6,0.5, body extent -0.9,-0.67 0.9,0.67, height 0.8
SOIC127P970X330-8N [mm] "SOIC, 8-Leads, Body 6.1x6.8mm (max), Pitch 1.27mm, IPC Medium Density"
  oval 2.16x0.76 smd: 1(-4.225,1.905) 2(-4.225,0.635) 3(-4.225,-0.635) 4(-4.225,-1.905) 5(4.225,-1.905) 6(4.225,-0.635) 7(4.225,0.635) 8(4.225,1.905)
  silkscreen extent -4.35,-3.05 2.7,3.05, body extent -3.4,-3.05 3.4,3.05, height 3.3
SOT65P210X110-3N [mm]
  rect 1.3x0.55 smd: 1(-0.85,0.65) 2(0.85,0) 3(-0.85,-0.65)
  silkscreen extent -0.98,-1.1 0.7,1.6, body extent -0.7,-1.1 0.7,1.1, height 1.1
VT4_SicMosfet#1 [mm]
  oval 3x2.15 hole 1.6: 1(0,5.08) 2(0,0) 3(0,-2.54) 4(0,-5.08)
  Keep-Out Layer lines w0.254: 10.414,-3.175 10.414,3.048 16.51,3.048 16.51,-3.175 10.414,-3.175
  silkscreen extent -1.91,-7.62 17.02,7.62
VT4_SicMosfet#2 [mm]
  oval 3x2.15 hole 1.6: 1(0,5.08) 2(0,0)
  oval 3x2.032 hole 1.6: 3(0,-2.54) 4(0,-5.08)
  Keep-Out Layer lines w0.254: 10.414,-3.175 10.414,3.048 16.51,3.048 16.51,-3.175 10.414,-3.175
  silkscreen extent -1.91,-7.62 17.02,7.62

## Part data
C5: library part Cap_UMF212B7104KGHT, "0.1uF, 50V, MLCC"
C6: library part C_ceram_HV
C14_M1 C14_M2 C14_M3 C14_M4 C14_M5 C14_M6 C17_M1 C17_M2 C17_M3 C17_M4 C17_M5 C17_M6: "0.1u, 50V"
C15_M1 C15_M2 C15_M3 C15_M4 C15_M5 C15_M6: "10p, 100V"
D1 VD1: library part LED_APTD2012LCGCK, "Green LED, 0805"
D2: library part Diode_MMDL914T1G, "100 V, 200mA, Diodes"
D3_M1 D3_M2 D3_M3 D3_M4 D3_M5 D3_M6: "Zener diode"
D5_M1 D5_M2 D5_M3 D5_M4 D5_M5 D5_M6 D6_M1 D6_M2 D6_M3 D6_M4 D6_M5 D6_M6: library part Zener_MMSZ5233BT1G, "6V, 500mW, Zener Diodes"
JP1: "2x10x2.54mm, Shrouded"
P4 P5: library part Header_3-Pin_281695-3, "3x2.54mm, Headers & Wire Housings"
R5 R7: library part Res_CRCW08052K00FKEAC, "2k, 0.125W, 1%, 0805, Thick Film Resistors"
R6: library part RK73H2ATTD47R0F, "47, 0.330 W, 0805, Thick Film Resistors"
R8_M1 R8_M2 R8_M3 R8_M4 R8_M5 R8_M6: "10k, 0.25 W"
R9_M1 R9_M2 R9_M3 R9_M4 R9_M5 R9_M6 R11_M1 R11_M2 R11_M3 R11_M4 R11_M5 R11_M6: "160R, 0.125W"
SW1: library part SW_09.03290.01, "12 VDC, Slide Switches"

## Free pads (board coordinates)
  round 236.22 hole 177.17: 0(248.15,585) 0(255,6625) 0(7150,6630) 0(7155,600)
  round 70 hole 30: 1(7151.25,6628.75) 2(7153.75,601.25)

## Via types
v1: diameter 50, hole 28, PowerLayer1 to SignalLayer, 59 vias

## Nets (pads, with @x,y where several pads share a name; then routed paths per layer and width w, separated by ;. In a path a pad name is that pad's centre, name@x,y a point inside that pad or via, vN(x,y) a via of type N, cw(c..) or ccw(c..) an arc to the next point about the centre after c; other vN are vias at no path point)
+12V: C2.1 C4.1 C12_M1.1 C12_M2.1 C12_M3.1 C12_M4.1 C12_M5.1 C12_M6.1 D2.2 L1.4 P4.1 P5.1 R4.1 R5.1 SW1.3 U1_M1.1 U1_M2.1 U1_M3.1 U1_M4.1 U1_M5.1 U1_M6.1 | length 18993.7
  PowerLayer1 w40: v1(641.54,3630) 641.54,3703.68 687.85,3750 P4.1@790,3750
  PowerLayer1 w60: SW1.3@210,1903.7 208.09,1901.79 120.15,1901.79 85,1866.64 85,1554.99 ; P5.1@380,990 155,990 85,1060 85,1554.99 ; P4.1@790.95,3750.95 791.91,3751.91 791.91,3859.85 827.06,3895 2220,3895 ; U1_M6.1@2561.63,2843.82 2233.82,2843.82 2220,2830 ; U1_M5.1@2564.34,3787.17 2220,3787.17 ; U1_M4.1@2564.34,4727.23 2273.6,4727.23 2220,4673.62 2220,3895 ; 4820,1523.55 4798.55,1545 ; C4.1@5045.63,890 5055,880.63 C4.1@5055,855 ; U1_M1.1@6307.66,2833.46 6510,2833.46 ; U1_M2.1@6310.34,1886.7 6510,1886.7 ; U1_M3.1@6310.45,3942.1 6452.9,3942.1 6510,3885 6510,2833.46 ; 85,1554.99 94.99,1545 2440,1545 ; 2220,2830 2220,3787.17 ; 2220,2830 2220,1765 2440,1545 ; 2220,3787.17 2220,3895 ; 2440,1545 4798.55,1545 ; 4798.55,1545 6230.68,1545 6510,1824.32 6510,1886.7 ; 6510,1886.7 6510,2833.46
  PowerLayer1 w80: 4820,1523.55 4820,981.38 4911.38,890 C4.1@5045.63,890
  PowerLayer1 w100: C4.1@5065.63,878.58 5490.47,878.58 L1.4@5516.89,905
  SignalLayer w40: SW1.3@210,1903.7 218.12,1903.7 236.43,1922.01 C2.1@350,1922.01 ; D2.2@591.61,3630 v1(641.54,3630) ; P4.1@790,3750 790.59,3749.41 790.59,3646.34 R5.1@791.18,3645.75
  SignalLayer w50: C12_M6.1@2538.25,2729.38 2538.25,2798.35 2561.11,2821.21 U1_M6.1@2561.11,2823.66 ; C12_M5.1@2541.48,3692.89 2541.48,3761.86 2564.34,3784.72 U1_M5.1@2564.34,3787.17
  SignalLayer w60: R4.1@216.58,975 R4.1@250,975 364.73,975 379.73,990 P5.1@380,990 ; C12_M4.1@2548.84,4640.61 2548.84,4667.62 2564.34,4683.12 U1_M4.1@2564.34,4727.23 ; U1_M1.1@6307.66,2833.46 6330.52,2856.32 C12_M1.1@6330.52,2927.74 ; U1_M2.1@6310.34,1886.7 6333.2,1909.56 C12_M2.1@6333.2,1980.98 ; U1_M3.1@6310.45,3942.1 6333.31,3964.96 C12_M3.1@6333.31,4036.38
G1: D5_M1.1 IC1_M1.6 Q6.4 R10_M1.2 | length 830.4
  PowerLayer1 w30: R10_M1.2@5490,3552.42 5487.91,3550.33 5487.91,3547.59 5487.91,3474.27 5520.5,3441.68 IC1_M1.6@5731.59,3441.68
  PowerLayer1 w60: Q6.4@5295,3470 5305.06,3470 5324.06,3488.99 5324.06,3495.44 5376.2,3547.59 R10_M1.2@5461.55,3547.59 ; R10_M1.2@5457.01,3543.05 R10_M1.2@5461.55,3547.59 ; R10_M1.2@5487.91,3547.59 R10_M1.2@5461.55,3547.59 ; R10_M1.2@5490,3552.42 5466.38,3552.42 R10_M1.2@5461.55,3547.59
  SignalLayer w30: Q6.4@5295,3470 5298.01,3470 5384.07,3556.05 D5_M1.1@5487.91,3556.05
G2: D5_M2.1 IC1_M2.6 Q2.4 R10_M2.2 | length 782.4
  PowerLayer1 w30: R10_M2.2@5492.68,2605.66 5490.59,2603.57 5490.59,2527.51 5523.18,2494.92 IC1_M2.6@5734.26,2494.92
  PowerLayer1 w60: Q2.4@5295,2549.6 5305.06,2549.6 5323.12,2567.65 5323.12,2570.51 5358.26,2605.66 R10_M2.2@5492.68,2605.66
  SignalLayer w30: Q2.4@5295,2549.6 5315.84,2549.6 5375.53,2609.29 D5_M2.1@5490.59,2609.29 D5_M2.1@5488.22,2606.92
G3: D5_M3.1 IC1_M3.6 Q3.4 R10_M3.2 | length 728.9
  PowerLayer1 w30: R10_M3.2@5492.79,4661.05 5490.71,4658.97 5490.71,4582.9 5523.29,4550.32 IC1_M3.6@5734.38,4550.32
  PowerLayer1 w60: Q3.4@5300,4670 5304.47,4665.53 5488.32,4665.53 R10_M3.2@5492.79,4661.05
  SignalLayer w30: Q3.4@5300,4670 5302.66,4667.34 5488.05,4667.34 D5_M3.1@5490.71,4664.69 D5_M3.1@5488.34,4662.32
G4: D5_M4.1 IC1_M4.6 Q5.4 R10_M4.2 | length 785.4
  PowerLayer1 w30: IC1_M4.6@3140.41,4119.01 3351.5,4119.01 3384.09,4086.42 3384.09,4010.36 R10_M4.2@3382.87,4009.14
  PowerLayer1 w60: R10_M4.2@3382,4008.27 3382.87,4009.14 3594.14,4009.14 Q5.4@3595,4010
  PowerLayer1 w70: R10_M4.2@3382,4008.27 R10_M4.2@3405.62,4008.27
  SignalLayer w30: D5_M4.1@3384.09,4004.64 3386.77,4007.32 3592.32,4007.32 Q5.4@3595,4010
G5: D5_M5.1 IC1_M5.6 Q4.4 R10_M5.2 | length 694.6
  PowerLayer1 w30: IC1_M5.6@3140.41,3178.95 3351.5,3178.95 3384.09,3146.37 3384.09,3070.3 R10_M5.2@3382,3068.22
  PowerLayer1 w70: R10_M5.2@3382,3068.22 R10_M5.2@3405.62,3068.22 ; 3453.14,3070 Q4.4@3590,3070
  SignalLayer w30: D5_M5.1@3384.09,3064.58 D5_M5.1@3386.46,3066.95 ; D5_M5.1@3395.43,3070 Q4.4@3590,3070
G6: D5_M6.1 IC1_M6.6 Q1.4 R10_M6.2 | length 748.4
  PowerLayer1 w30: IC1_M6.6@3137.19,2215.44 3348.27,2215.44 3380.86,2182.85 3380.86,2106.79 R10_M6.2@3378.77,2104.7
  PowerLayer1 w60: R10_M6.2@3379.29,2124.86 3525.64,2124.86 3550.38,2149.6 Q1.4@3573.78,2149.6
  SignalLayer w30: D5_M6.1@3383.23,2103.44 D5_M6.1@3380.86,2101.07 3386.96,2101.07 3415.33,2129.44 ; 3415.85,2149.6 Q1.4@3573.78,2149.6